# EAGLE board design (EAGLE 6.4)
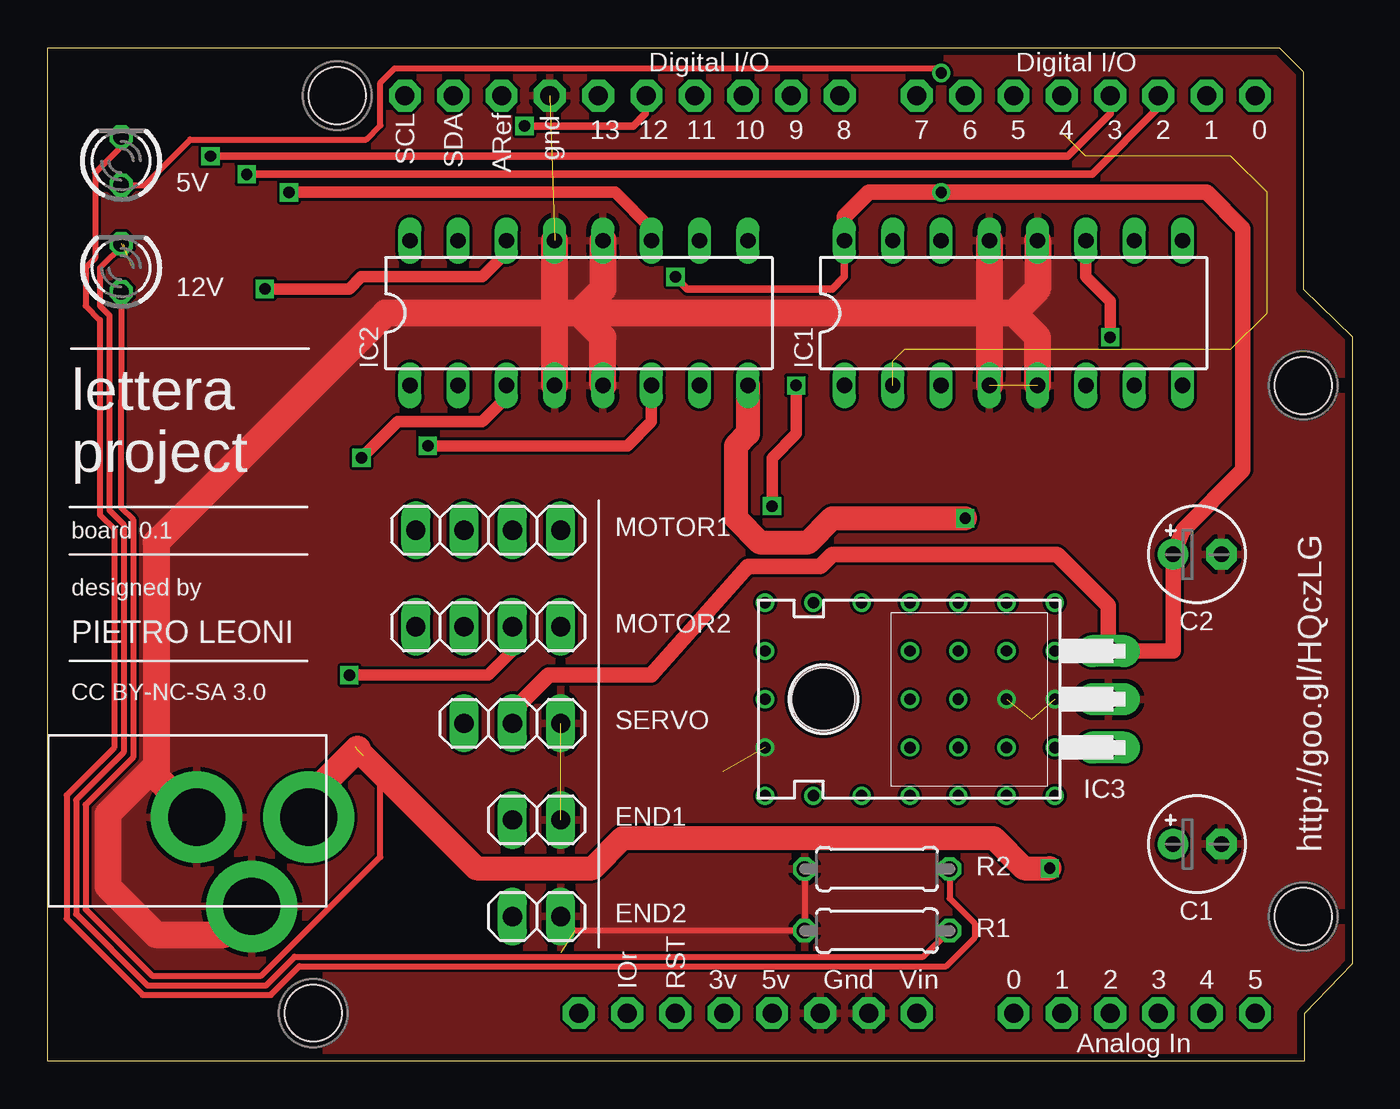
[diagram p0: board, top side]
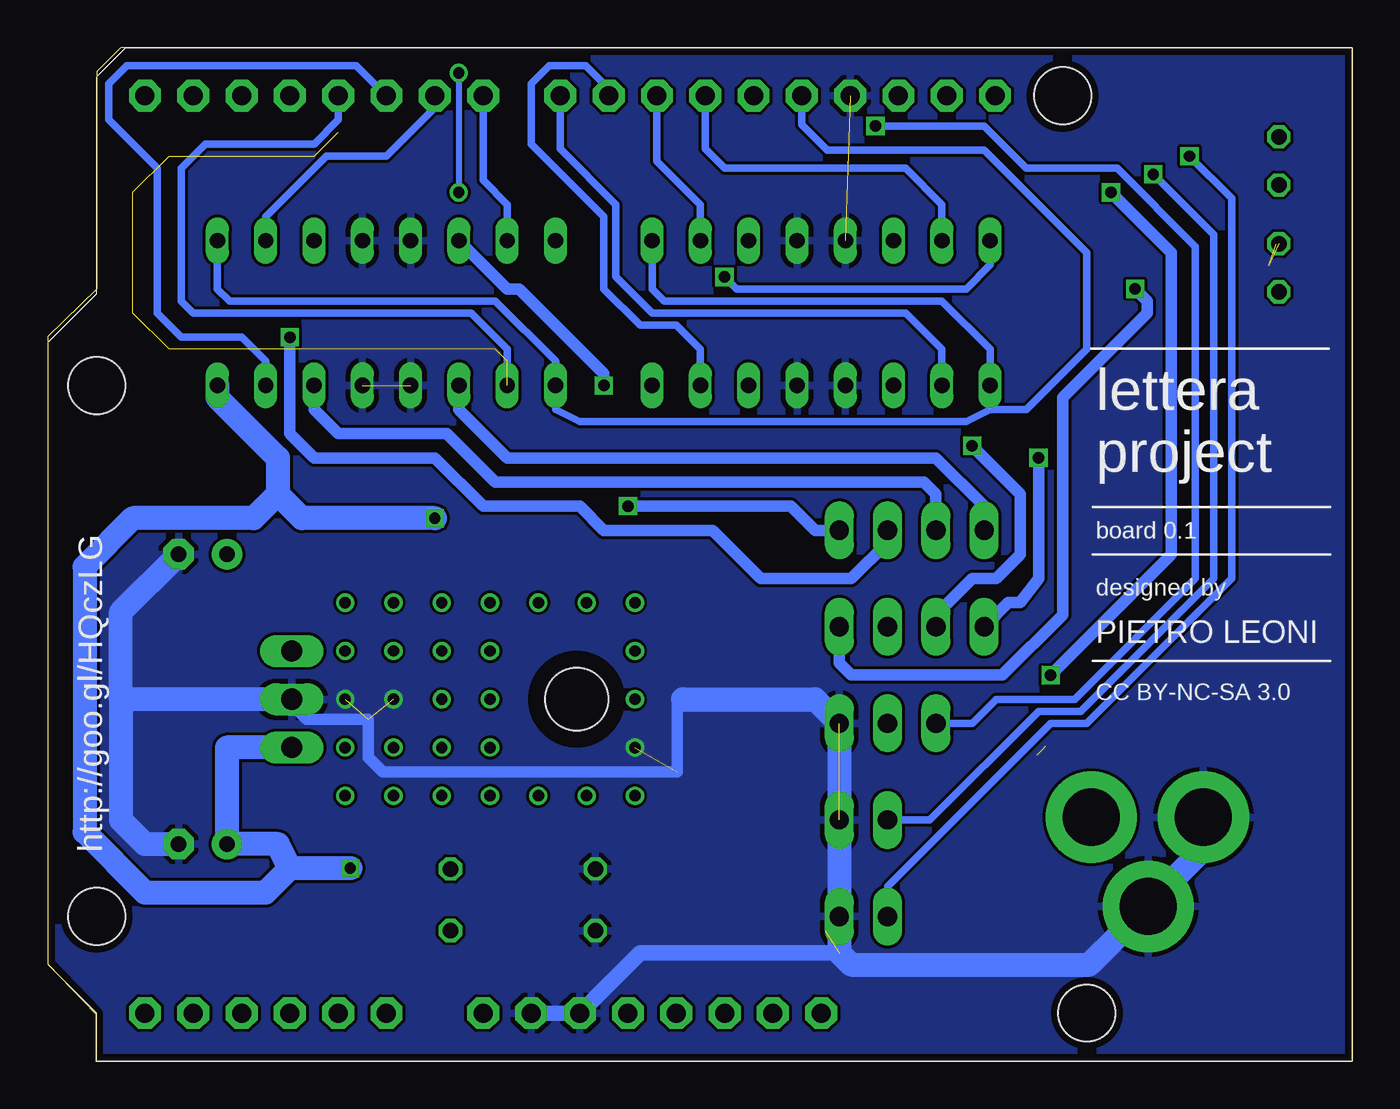
[diagram p1: board, bottom side, seen from below]

Size 68.62 x 53.34 mm. Coordinates in mm from the lower left corner, seen from the top.
Outline: 0,0 0,53.34 64.77,53.34 66.04,52.07 66.04,40.64 68.62,38.12 68.62,5.12 66.08,2.51 66.08,0 0,0
Copper layers (1*16): Top 0.0356mm / dielectric 1.5011mm / Bottom 0.0356mm
Design rules "LaenPCBOrder": minimum track width 6mil, minimum drill 13mil, track to track 6mil, track to pad 6mil, pad to pad 6mil, via to via 6mil, smd to smd 6mil, copper to edge 15mil, drill to drill 6mil, minimum pad ring 7mil, minimum via ring 7mil, stop-mask expansion 4mil, vias tented up to drill 0mil, thermal gap 10mil
Holes 3 mm at 13.97,2.54 66.04,7.62 66.04,35.56 15.24,50.8

## Footprints (pad centres in the part's own frame; a part is rotated, then mirrored left to right if it is on the bottom)
E2,5-5 = drill 0.813 pad 1.6: + -1.27,0 | drill 0.813 pad 1.6 octagon: - 1.27,0
1X02 = drill 1.016 long: 1 -1.27,0; 2 1.27,0
DIL16 = drill 0.813 long: 1 -8.89,-3.81; 2 -6.35,-3.81; 3 -3.81,-3.81; 4 -1.27,-3.81; 5 1.27,-3.81; 6 3.81,-3.81; 7 6.35,-3.81; 8 8.89,-3.81; 9 8.89,3.81; 10 6.35,3.81; 11 3.81,3.81; 12 1.27,3.81; 13 -1.27,3.81; 14 -3.81,3.81; 15 -6.35,3.81; 16 -8.89,3.81
TO220H = drill 1.118 long: 1 -2.54,-10.16; 2 0,-10.16; 3 2.54,-10.16 | hole 3.302: 0,4.826
LED3MM = drill 0.813 octagon: A -1.27,0; K 1.27,0
1X04 = drill 1.016 long: 1 -3.81,0; 2 -1.27,0; 3 1.27,0; 4 3.81,0
0207/7 = drill 0.813 octagon: 1 -3.81,0; 2 3.81,0
1X03 = drill 1.016 long: 1 -2.54,0; 2 0,0; 3 2.54,0
ARDUINOR3-BPLACE = drill 1 pad 1.676 octagon: 3V 35.56,2.54; 5V 38.1,2.54; A0 50.8,2.54; A1 53.34,2.54; A2 55.88,2.54; A3 58.42,2.54; A4 60.96,2.54; A5 63.5,2.54; AREF 23.876,50.8; D0 63.5,50.8; D1 60.96,50.8; D2 58.42,50.8; D3 55.88,50.8; D4 53.34,50.8; D5 50.8,50.8; D6 48.26,50.8; D7 45.72,50.8; D8 41.656,50.8; D9 39.116,50.8; D10 36.576,50.8; D11 34.036,50.8; D12 31.496,50.8; D13 28.956,50.8; GND 26.416,50.8; GND1 43.18,2.54; GND2 40.64,2.54; IOREF 30.48,2.54; RESERVED 27.94,2.54; RESET 33.02,2.54; SCL 18.796,50.8; SDA 21.336,50.8; VIN 45.72,2.54
PJ-102A = drill 3 pad 4.8: RING 0.1,-3.39; RING_SW -4.6,-6.29; TIP 0.1,-9.29

## Placement (x,y rotation side)
C1  [E2,5-5]  60.46,11.43 0 top
C2  [E2,5-5]  60.46,26.67 0 top
END1  [1X02]  25.72,12.7 0 top
END2  [1X02]  25.72,7.62 0 top
IC1  L293D  [DIL16]  50.8,39.37 0 top
IC2  L293D  [DIL16]  27.94,39.37 0 top
IC3  7805T  [TO220H]  45.62,19.05 90 top
LED1  TLLG4400  [LED3MM]  3.88,41.75 90 top
LED2  TLLG4400  [LED3MM]  3.88,47.38 90 top
MOTOR1  [1X04]  23.18,27.94 0 top
MOTOR2  [1X04]  23.18,22.86 0 top
R1  [0207/7]  43.62,6.88 0 top
R2  [0207/7]  43.62,10.12 0 top
SERVO  [1X03]  24.45,17.78 0 top
U1  ARDUINOR3-BPLACE  [ARDUINOR3-BPLACE]  0,0 0 top
U$1  2.1MMJACKTHM  [PJ-102A]  4.45,12.75 90 top

## Library data of the parts
C1 C2 IC3 U1 U$1 = adafruit
END1 END2 MOTOR1 MOTOR2 SERVO = pinhead
IC1 IC2 = st-microelectronics; MPN: L293D; OC_FARNELL: 9589619; OC_NEWARK: 56P8249
LED1 LED2 = led; MF: VISHAY SEMICONDUCTOR; OC_FARNELL: 1612435
R1 R2 = rcl

## Nets
3V: U1.3V
5V: U1.5V
+5V: C2.+ IC1.16 IC2.16 IC3.3 LED2.A SERVO.2
+12V: C1.+ IC1.8 IC2.8 IC3.1 LED1.A U$1.TIP
ENABLE: IC1.1 IC1.9 IC2.1 IC2.9 U1.D13
END1: END1.1 U1.D2
END2: END2.1 U1.D3
GND: C1.- C2.- END1.2 END2.2 IC1.4 IC1.5 IC1.12 IC1.13 IC2.4 IC2.5 IC2.12 IC2.13 IC3.2 R1.1 R2.1 SERVO.3 U1.GND U1.GND1 U1.GND2 U$1.RING U$1.RING_SW
M1_IN1: IC1.2 U1.D4
M1_IN2: IC1.7 U1.D5
M1_IN3: IC1.10 U1.D6
M1_IN4: IC1.15 U1.D7
M1_O1: IC1.3 MOTOR1.1
M1_O2: IC1.6 MOTOR1.2
M1_O3: IC1.11 MOTOR1.3
M1_O4: IC1.14 MOTOR1.4
M2_IN1: IC2.2 U1.D8
M2_IN2: IC2.7 U1.D9
M2_IN3: IC2.10 U1.D10
M2_IN4: IC2.15 U1.D11
M2_O1: IC2.3 MOTOR2.1
M2_O2: IC2.6 MOTOR2.2
M2_O3: IC2.11 MOTOR2.3
M2_O4: IC2.14 MOTOR2.4
N$31: LED1.K R1.2
N$32: LED2.K R2.2
SERVO: SERVO.1 U1.D12
VIN: U1.VIN

## Tracks (layer width: path | path; a pad name or v marks a point on that pad's centre or on a via)
+5V  (via drill 0.6)
  Top 0.305: LED2.A 5.11,46.1 7.5,48.5 16.75,48.5 17.5,49.25 17.5,51.5 18.25,52.25 46.75,52.25 v47,52
  Top 0.406: IC1.16 41.91,41.27 41.27,40.64 33.66,40.64 v33.02,41.27
  Top 0.813: IC1.16 41.91,44.45 43.18,45.72 v47,45.72 60.96,45.72 62.87,43.81 62.87,31.11 59.69,27.94 C2.+ 59.19,21.59 IC3.3 55.78,24 53.11,26.67 41.27,26.67 40.64,26.04 36.83,26.04 31.75,20.32 26.35,20.32 24.45,18.41 SERVO.2
  Bottom 0.305: v47,52 v47,45.72
  Bottom 0.406: v33.02,41.27 32.38,40.64 20.32,40.64 19.05,41.91 IC2.16
+12V  (via drill 0.6)  (2 unrouted)
  Top 0.305: LED1.A 3.85,29.14 4.5,28.5 4.5,16 2,13.5 2,8 5.5,4.5 11.25,4.5 17.5,10.75 17.5,15 16.6,16.1
  Top 1.27: 16.6,16.1 22.54,10.16 28.66,10.16 30.25,11.75 49.75,11.75 51.34,10.16 v52.7,10.16 | IC2.8 36.83,33.02 36.2,32.38 36.2,28.57 37.47,27.3 40.01,27.3 41.27,28.57 v48.26,28.57
  Top 1.422: U$1.TIP 13.73,13.86 16.29,16.41
  Bottom 1.27: IC3.1 59.19,16.51 C1.+ 56.52,11.43 55.88,10.16 | IC1.8 59.69,34.92 56.52,31.75 56.52,29.84 | 56.52,29.84 57.78,28.57 64.14,28.57 66.67,26.04 66.67,12.06 63.5,8.89 57.15,8.89 55.88,10.16 | v52.7,10.16 55.88,10.16 | v48.26,28.57 55.24,28.57 56.52,29.84
ENABLE
  Bottom 0.406: U1.D13 28.96,49.28 27.62,47.94 19.37,47.94 13.97,42.55 13.97,37.47 17.14,34.29 19.05,34.29 | 19.05,34.29 IC2.1 19.05,37.47 21.59,40.01 36.2,40.01 36.83,40.64 IC2.9 | 19.05,34.29 20.32,33.66 40.64,33.66 41.91,34.29 IC1.1 41.91,36.83 45.09,40.01 59.05,40.01 59.69,40.64 IC1.9
END1  (via drill 0.6)
  Top 0.406: v10.48,46.67 54.93,46.67 58.42,50.16 U1.D2
  Bottom 0.406: END1.1 22.23,12.7 16.51,18.41 14.29,18.41 7.3,25.4 7.3,43.5 v10.48,46.67
END2  (via drill 0.6)
  Top 0.406: v8.57,47.62 53.66,47.62 55.88,49.85 U1.D3
  Bottom 0.406: END2.1 24.45,9.21 15.88,17.78 13.97,17.78 6.35,25.4 6.35,45.4 v8.57,47.62
GND  (via drill 0.6)  (7 unrouted)
  Top 0.305: END2.2 27.73,6.88 R1.1 R2.1
  Top 1.422: IC2.4 26.67,39.37 | 26.67,39.37 IC2.13 | IC1.13 IC1.4 | IC1.5 52.07,38.1 50.8,39.37 | IC1.12 52.07,40.64 50.8,39.37 | IC2.5 29.21,38.1 27.94,39.37 | 27.94,39.37 26.67,39.37 | 26.67,39.37 17.78,39.37 5.71,27.3 5.71,15.56 | 5.71,15.56 3.17,13.02 3.17,9.21 5.71,6.67 9.26,6.67 U$1.RING_SW | IC2.12 29.21,40.64 27.94,39.37 | 50.8,39.37 27.94,39.37 | 5.71,15.56 5.71,14.97 U$1.RING
  Bottom 0.61: IC3.2 57.73,19 56,19 55,18 51.75,18 51.75,16 50.99,15.24 35.51,15.24 35.51,18.74 35.2,19.05
  Bottom 0.813: 26.99,5.71 37.47,5.71 U1.GND2 U1.GND1
  Bottom 1.27: 35.2,19.05 28.26,19.05 SERVO.3 26.99,5.71 26.35,5.08 13.85,5.08 10.78,8.15 U$1.RING_SW | IC3.2 64.77,19.05 | 64.77,19.05 64.77,23.63 C2.- | 64.77,19.05 64.77,12.7 63.5,11.43 C1.-
  other vias: 52.98,19.05 50.44,19.05 37.73,16.51
  pour Bottom: 0,53.34 0,0 68.58,0.07 68.58,53.34
  pour Top: 0,53.34 0,0 68.58,0 68.58,53.34
M1_IN1  (8 unrouted)
  Bottom 0.406: U1.D4 53.34,49.53 54.61,48.26 60.33,48.26 61.59,46.99 61.59,40.01 60.96,39.37 46.35,39.37 44.45,37.47 IC1.2
M1_IN2
  Bottom 0.406: IC1.7 57.15,36.83 58.42,38.1 61.59,38.1 62.87,39.37 62.87,46.99 65.41,49.53 65.41,51.44 64.45,52.39 52.39,52.39 U1.D5
M1_IN3
  Bottom 0.406: U1.D6 48.26,50.16 50.8,47.62 53.98,47.62 57.15,44.45 IC1.10
M1_IN4
  Bottom 0.406: U1.D7 45.72,46.35 44.45,45.09 IC1.15
M1_O1
  Bottom 0.61: MOTOR1.1 19.37,29.21 21.91,31.75 44.45,31.75 46.99,34.29 IC1.3
M1_O2
  Bottom 0.61: MOTOR1.2 21.91,29.84 22.54,30.48 45.09,30.48 47.62,33.02 53.34,33.02 54.61,34.29 IC1.6
M1_O3  (via drill 0.6)
  Top 0.61: v55.88,38.1 55.88,40.01 54.61,41.27 IC1.11
  Bottom 0.61: MOTOR1.3 24.45,27.3 26.35,25.4 31.11,25.4 33.66,27.94 39.37,27.94 40.64,29.21 45.72,29.21 48.26,31.75 54.61,31.75 55.88,33.02 v55.88,38.1
M1_O4  (via drill 0.6)
  Top 0.61: v38.1,29.21 38.1,31.75 39.37,33.02 v39.37,35.56
  Bottom 0.61: MOTOR1.4 28.26,27.94 29.53,29.21 v38.1,29.21 | v39.37,35.56 39.37,36.2 43.81,40.64 44.45,40.64 IC1.14
M2_IN1
  Bottom 0.406: U1.D8 41.66,48.01 38.73,45.09 38.73,41.27 36.83,39.37 23.5,39.37 21.59,37.47 IC2.2
M2_IN2
  Bottom 0.406: U1.D9 39.12,51.18 40.32,52.39 42.23,52.39 43.18,51.44 43.18,48.26 39.37,44.45 39.37,40.64 37.47,38.73 35.56,38.73 34.29,37.47 IC2.7
M2_IN3
  Bottom 0.406: U1.D10 36.58,47.37 34.29,45.09 IC2.10
M2_IN4
  Bottom 0.406: U1.D11 34.04,48.01 33.02,46.99 23.5,46.99 21.59,45.09 IC2.15
M2_O1  (via drill 0.6)
  Top 0.61: v16.51,31.75 18.41,33.66 22.86,33.66 24.13,34.92 IC2.3
  Bottom 0.61: v16.51,31.75 16.51,25.4 17.46,24.13 18.1,24.13 MOTOR2.1
M2_O2  (via drill 0.6)
  Top 0.61: v20,32.38 30.48,32.38 31.75,33.66 IC2.6
  Bottom 0.61: MOTOR2.2 21.91,23.5 20,25.4 18.73,25.4 17.46,26.67 17.46,29.84 v20,32.38
M2_O3  (via drill 0.6)
  Top 0.61: MOTOR2.3 24.45,21.59 23.18,20.32 v15.88,20.32 | v12.7,45.72 29.84,45.72 31.75,43.81 IC2.11
  Bottom 0.61: v15.88,20.32 9.53,26.67 9.53,42.55 v12.7,45.72
M2_O4  (via drill 0.6)
  Top 0.61: v11.43,40.64 15.88,40.64 16.51,41.27 22.86,41.27 24.13,42.55 IC2.14
  Bottom 0.61: MOTOR2.4 26.99,20.95 26.35,20.32 18.41,20.32 15.24,23.5 15.24,34.92 10.79,39.37 10.79,40.01 v11.43,40.64
N$1  (via drill 0.6)
  other vias: 50.44,13.97
N$2  (via drill 0.6)
  other vias: 52.98,16.51
N$3  (via drill 0.6)
  other vias: 52.98,21.59
N$4  (via drill 0.6)
  other vias: 52.98,13.97
N$5  (via drill 0.6)
  other vias: 52.98,24.13
N$6  (via drill 0.6)
  other vias: 50.44,16.51
N$7  (via drill 0.6)
  other vias: 50.44,21.59
N$8  (via drill 0.6)
  other vias: 50.44,24.13
N$9  (via drill 0.6)
  other vias: 47.9,24.13
N$10  (via drill 0.6)
  other vias: 47.9,21.59
N$11  (via drill 0.6)
  other vias: 47.9,19.05
N$12  (via drill 0.6)
  other vias: 47.9,16.51
N$13  (via drill 0.6)
  other vias: 47.9,13.97
N$14  (via drill 0.6)
  other vias: 45.35,13.97
N$15  (via drill 0.6)
  other vias: 45.35,16.51
N$16  (via drill 0.6)
  other vias: 45.35,19.05
N$17  (via drill 0.6)
  other vias: 45.35,21.59
N$18  (via drill 0.6)
  other vias: 45.35,24.13
N$19  (via drill 0.6)
  other vias: 42.81,24.13
N$20  (via drill 0.6)
  other vias: 40.27,24.13
N$21  (via drill 0.6)
  other vias: 37.73,24.13
N$22  (via drill 0.6)
  other vias: 37.73,21.59
N$23  (via drill 0.6)
  other vias: 37.73,19.05
N$24  (via drill 0.6)
  other vias: 37.73,13.97
N$25  (via drill 0.6)
  other vias: 42.81,13.97
N$26  (via drill 0.6)
  other vias: 40.27,13.97
N$27
  Bottom 1.27: 8.25,12.62 8.25,10.75 10.88,8.12
N$31  (2 unrouted)
  Top 0.305: 4,43 2.75,41.75 2.75,39.75 3.25,39.25 3.25,29 4,28.25 4,16.25 1.5,13.75 1.5,7.75 5.25,4 11.5,4 13,5.5 46.06,5.5 R1.2
N$32
  Top 0.305: R2.2 47.44,8.56 48.75,7.25 48.75,6.5 47.25,5 13.25,5 11.75,3.5 5,3.5 1,7.5 1,14 3.5,16.5 3.5,28 2.75,28.75 2.75,39 2,39.75 2,41.75 2.5,42.25 2.5,46.75 3.88,48.12 LED2.K
SERVO  (via drill 0.6)
  Top 0.406: v25.08,49.21 30.8,49.21 31.43,49.85 31.43,50.74 U1.D12
  Bottom 0.406: SERVO.1 20,17.78 18.73,19.05 14.61,19.05 8.26,25.4 8.26,42.86 12.38,46.99 17.14,46.99 19.37,49.21 v25.08,49.21

## Text on the board
tNames: 5V | 12V | lettera / project | board 0.1 | designed by | PIETRO LEONI | CC BY-NC-SA 3.0 | http://goo.gl/HQczLG
bNames: lettera / project | board 0.1 | designed by | PIETRO LEONI | CC BY-NC-SA 3.0 | http://goo.gl/HQczLG